# Altium PCB Sensor.PcbDoc
Units mil, origin at the board's own origin, x right, y up, seen from the top; angles counter-clockwise.
Board outline 1750 x 3170 mil, 4 copper layers (Top Layer, Layer 1, Layer 2, Bottom Layer), stack 22.378 mil thick; 58 components, 41 nets, 155 pads, 237 vias.
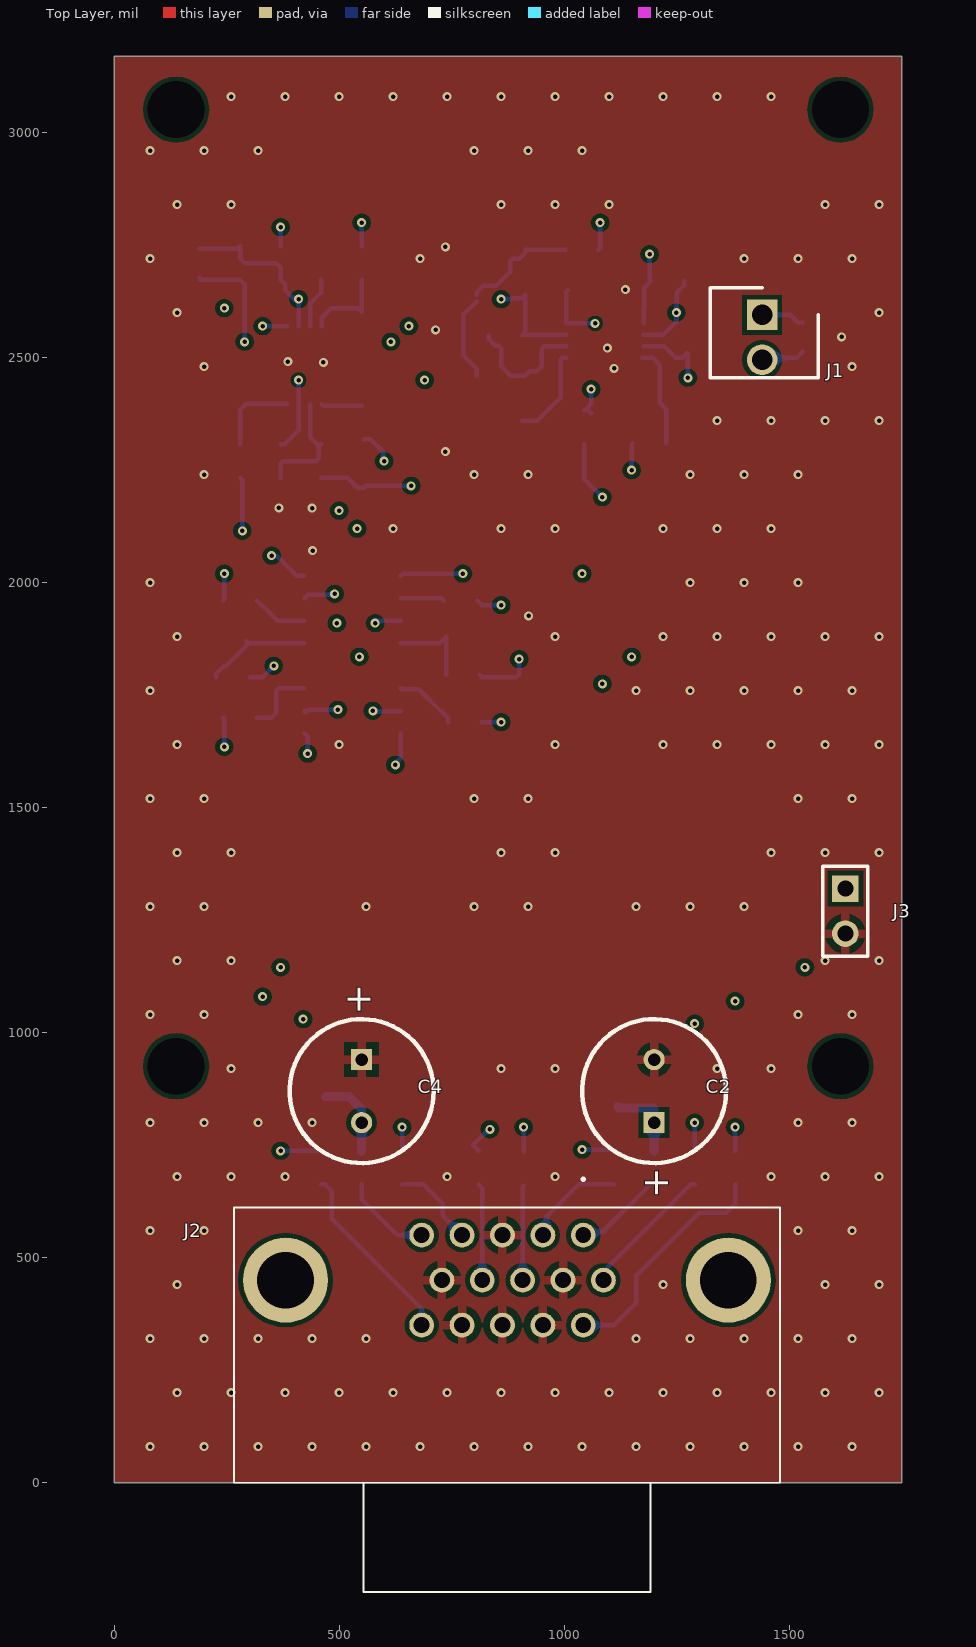
[diagram p0: Top Layer view]
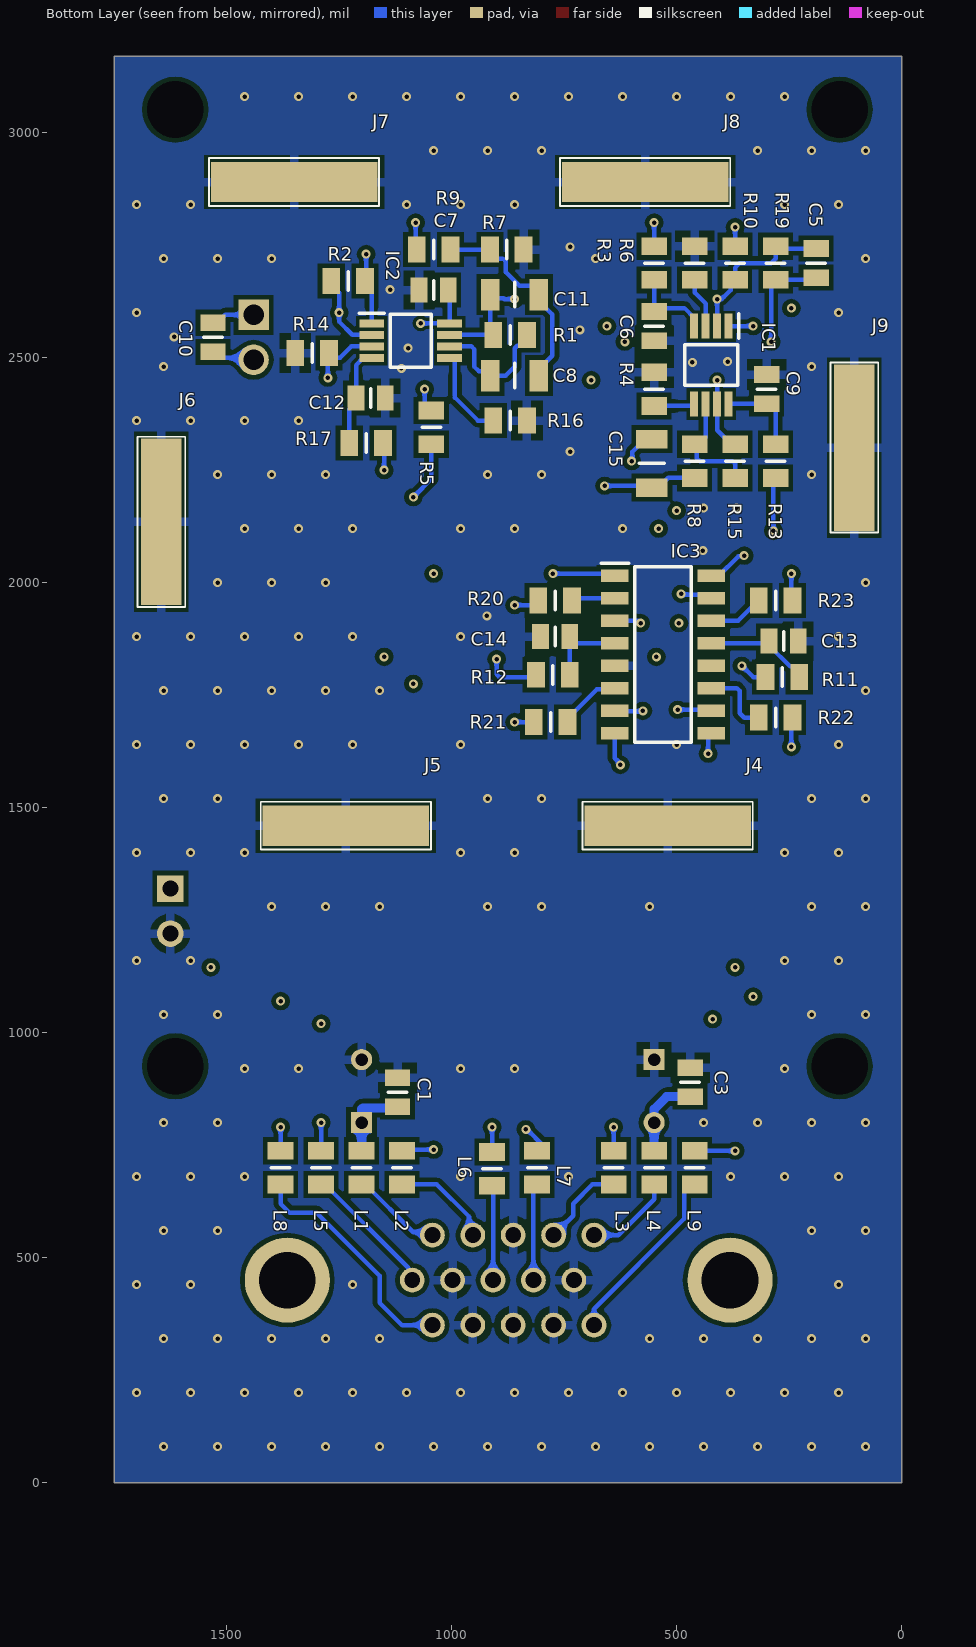
[diagram p1: Bottom Layer view, seen from below]
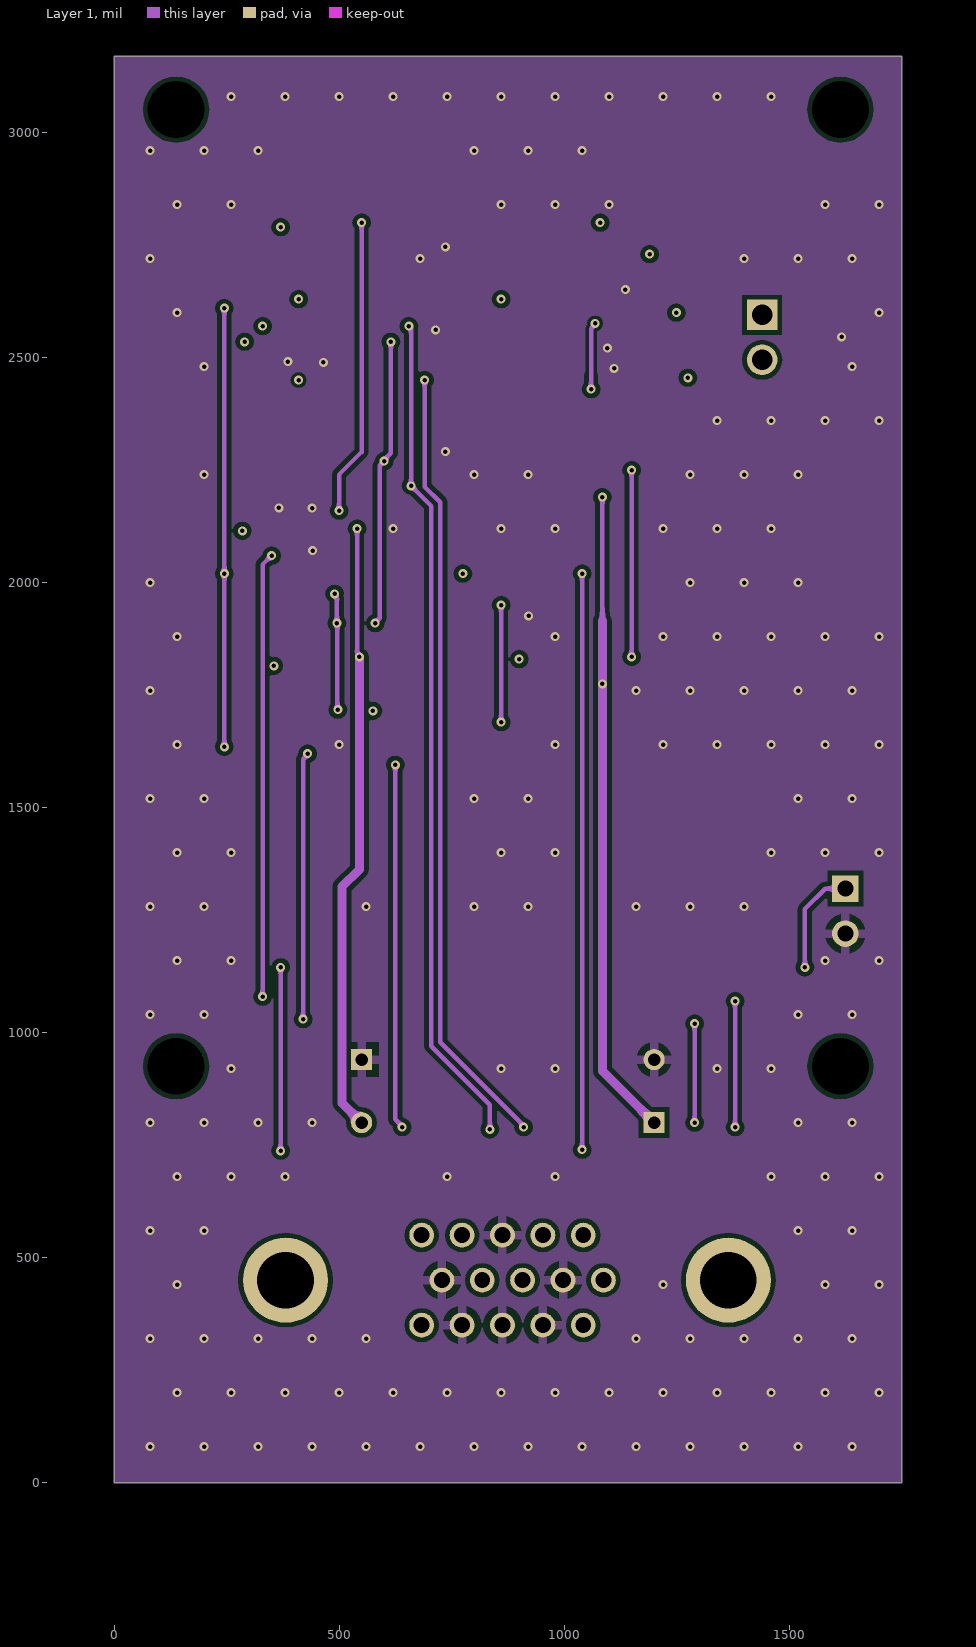
[diagram p2: Layer 1]
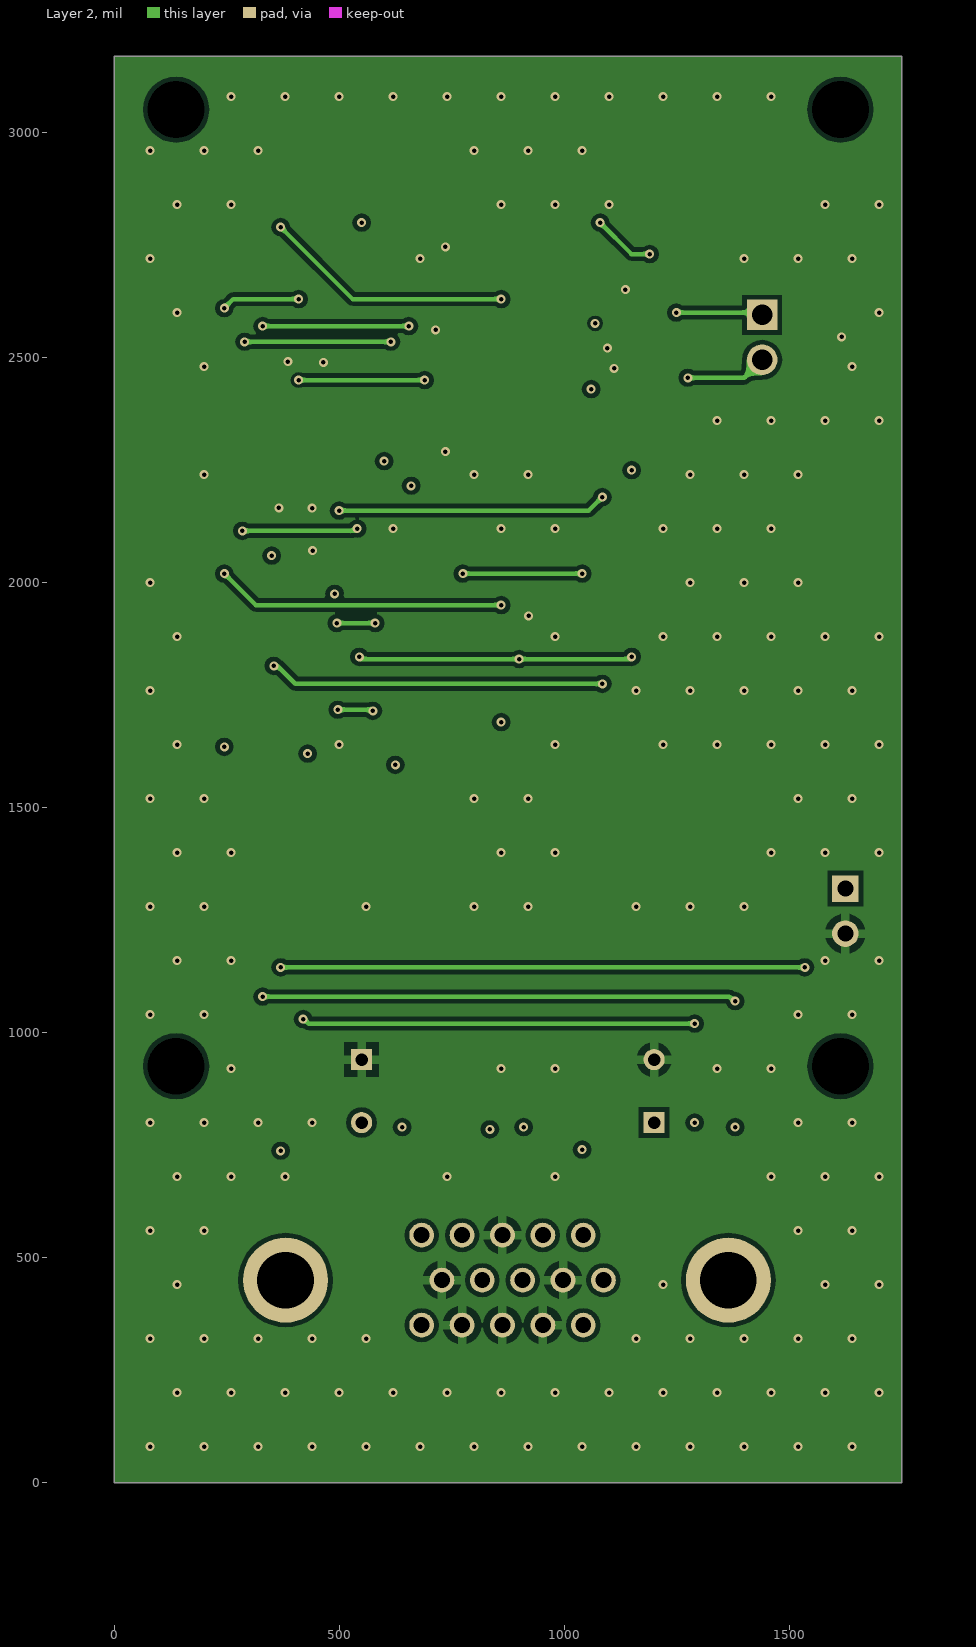
[diagram p3: Layer 2]
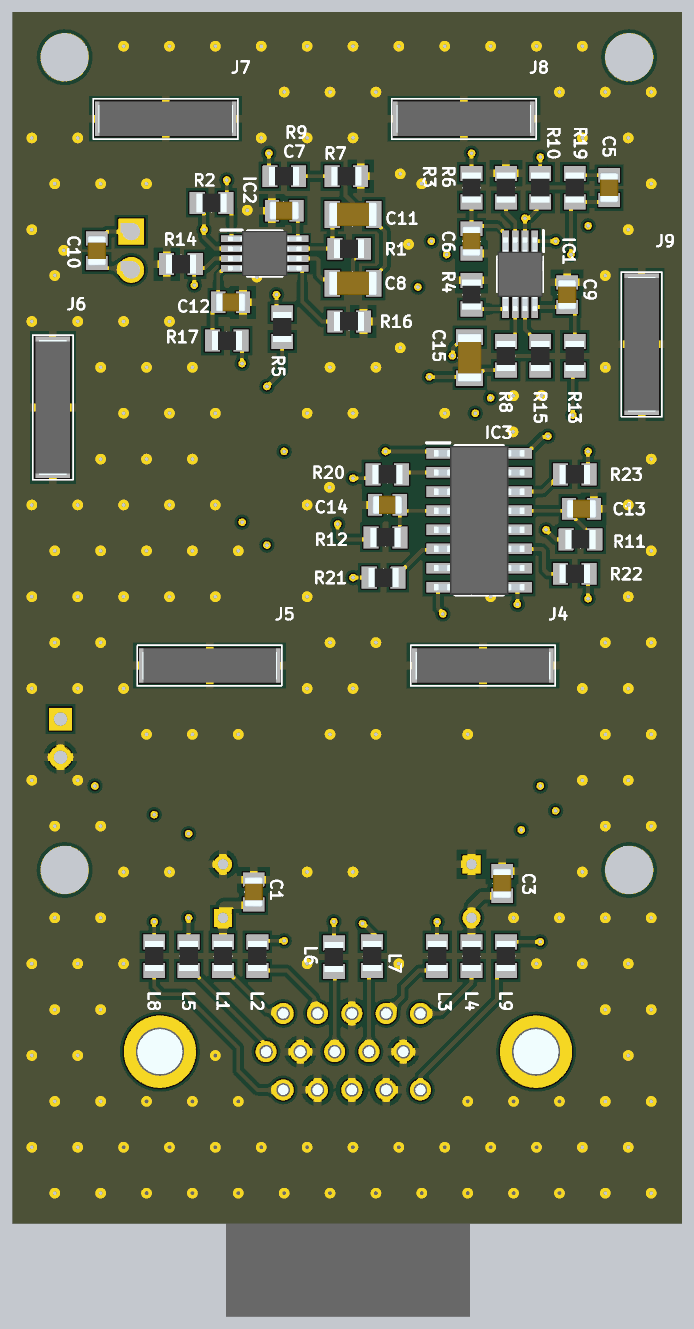
[diagram p4: 3D render of the assembled board from below, using the file's embedded part models]

## Layer stack, top to bottom
Top Solder: solder mask 0.4, Solder Resist, Dk 3.5
Top Layer: signal copper 1.4
Dielectric 2: prepreg 2.8, PP-006, Dk 4.1
Layer 1: signal copper 0.689
Dielectric 1: dielectric 12.6, FR-4, Dk 4.8
Layer 2: signal copper 0.689
Dielectric 3: prepreg 2.8, PP-006, Dk 4.1
Bottom Layer: signal copper 1.4
Bottom Solder: solder mask 0.4, Solder Resist, Dk 3.5

## Board outline
0,0 1750,0 1750,3170 0,3170

## Design rules (kind name [scope] priority, off if disabled: settings)
Clearance Clearance_Room_IC1&2 [WithinRoom('Room_IC1') OR WithinRoom('Room_IC2')] p1: gap=7 ignorepadtopadclearanceinfootprint=FALSE
Clearance [All] p2: gap=10 ignorepadtopadclearanceinfootprint=FALSE except(0: Arc-Hole Track-Hole SMDPad-Hole THPad-Hole Via-Hole Fill-Hole Poly-Hole Region-Hole Text-Hole)
ComponentClearance [All] p1 off: gap=10 collisioncheckmode=3 verticalgap=10 showdistances=FALSE
DiffPairsRouting [All] p1: maxlimit=20 minlimit=10 mostfreqgap=10 toplayer_minwidth=10 toplayer_maxwidth=15 toplayer_prefwidth=10 midlayer1_minwidth=10 midlayer1_maxwidth=15 midlayer1_prefwidth=10 midlayer2_minwidth=10 midlayer2_maxwidth=15 midlayer2_prefwidth=10 bottomlayer_minwidth=10 bottomlayer_maxwidth=15 bottomlayer_prefwidth=10 maxuncoupledlength=500
PlaneConnect PlaneConnect_VIA_GND [InNet('GND')] p1: pad.planeconnectstyle=Relief pad.reliefexpansion=20 pad.reliefentries=4 pad.reliefconductorwidth=10 pad.reliefairgap=10 via.planeconnectstyle=Direct via.reliefexpansion=20 via.reliefentries=4 via.reliefconductorwidth=10 via.reliefairgap=0
PlaneConnect [All] p2: planeconnectstyle=Relief reliefexpansion=20 reliefentries=4 reliefconductorwidth=10 reliefairgap=10
PolygonConnect PolygonConnect_VIA_GND [All] p1: thpad.connectstyle=Relief thpad.reliefconductorwidth=20 thpad.reliefentries=4 thpad.polygonreliefangle="90 Angle" thpad.airgapwidth=15 smdpad.connectstyle=Relief smdpad.reliefconductorwidth=20 smdpad.reliefentries=4 smdpad.polygonreliefangle="90 Angle" smdpad.airgapwidth=15 via.connectstyle=Direct via.reliefconductorwidth=20 via.reliefentries=4 via.polygonreliefangle="90 Angle" via.airgapwidth=15
PolygonConnect [All] p2: connectstyle=Relief reliefconductorwidth=20 reliefentries=4 polygonreliefangle="90 Angle" airgapwidth=15
RoomDefinition Room_IC2 [False] p1: confinementstyle=ConfineIn formatcopy=TRUE lockcomponents=FALSE outline 1220,2620 1220,2460 960,2460 960,2620
RoomDefinition Room_IC1 [False] p2: confinementstyle=ConfineIn formatcopy=TRUE lockcomponents=FALSE outline 503.03,2344.33 343.03,2344.33 343.03,2624.33 503.03,2624.33
RoutingVias [All] p1: holewidth=10 width=20 viastyle="Through Hole" minholewidth=7.87 minwidth=15.75 maxholewidth=28 maxwidth=50
SolderMaskExpansion [All] p1: expansion=4 istentingtop=FALSE
Width [All] p1: maxlimit=100 minlimit=10 preferedwidth=20
27 further rules are at their usual default settings.

## Components (designator, comment, footprint, x,y, rotation, side; value= is the part's Value field where it differs from the comment)
C1 "Capacitor_SMD" CAPC2012X140N 1120,867.72 r90 bottom value=100n
C2 "Capacitor Electrolytic" CAP_EL_8X12R3_5 1200,870 r270 top value=330u
C3 "Capacitor_SMD" CAPC2012X140N 470,890 r90 bottom value=100n
C4 "Capacitor Electrolytic" CAP_EL_8X12R3_5 550,870 r90 top value=330u
C5 "Capacitor_SMD" CAPC2012X140N 190,2710 r90 bottom value=100n
C6 "Capacitor_SMD" CAPC2012X140N 550,2570 r90 bottom value=100n
C7 "Capacitor_SMD" CAPC2012X140N 1040,2650 r180 bottom value=100n
C8 "Capacitor_SMD" CAPC3216X95N 860,2460 r0 bottom value=100n
C9 "Capacitor_SMD" CAPC2012X140N 300,2430 r270 bottom value=100n
C10 "Capacitor_SMD" CAPC2012X140N 1530,2545 r270 bottom value=10p
C11 "Capacitor_SMD" CAPC3216X95N 860,2640 r0 bottom value=100n
C12 "Capacitor_SMD" CAPC2012X140N 1180,2410 r0 bottom value=100n
C13 "Capacitor_SMD" CAPC2012X140N 262.28,1870 r180 bottom value=100n
C14 "Capacitor_SMD" CAPC2012X140N 770,1880 r180 bottom value=100n
C15 "Capacitor_SMD" CAPC3216X95N 555,2265 r90 bottom value=100n
IC1 "AZ4580" SOP65P490X110-8N 422.8,2483.39 r270 bottom
IC2 "AZ4580" SOP65P490X110-8N 1090.94,2537.64 r180 bottom
IC3 "DG442DY-E3" SOIC127P600X175-16N 530,1840 r180 bottom
J1 "640456-2" SHDR2W66P0X254_1X2_508X572X1041P 1440,2595 r90 top
J2 "D-Sub 15 pin" ICD15S13E4GV00LF 1042.56,550 r0 top
J3 "Header 2" HDR1X2 1625,1320 r270 top
J4 "S2711-46R" S271146R 520,1460 r180 bottom
J5 "S2711-46R" S271146R 1235,1460 r180 bottom
J6 "S2711-46R" S271146R 1645,2135 r270 bottom
J7 "S2711-46R" S271146R 1350,2890 r0 bottom
J8 "S2711-46R" S271146R 570,2890 r180 bottom
J9 "S2711-46R" S271146R 105,2300 r90 bottom
L1 "Ferrite Bead" RESC2012X60N 1200,700 r270 bottom
L2 "Ferrite Bead" RESC2012X60N 1110,700 r270 bottom
L3 "Ferrite Bead" RESC2012X60N 640,700 r270 bottom
L4 "Ferrite Bead" RESC2012X60N 550,700 r270 bottom
L5 "Ferrite Bead" RESC2012X60N 1290,700 r270 bottom
L6 "Ferrite Bead" RESC2012X60N 910,697.4 r270 bottom
L7 "Ferrite Bead" RESC2012X60N 810,700 r270 bottom
L8 "Ferrite Bead" RESC2012X60N 1380,700 r270 bottom
L9 "Ferrite Bead" RESC2012X60N 460,700 r270 bottom
R1 "Res_SMD" RESC2012X60N 870,2550 r0 bottom value=1k
R2 "Res_SMD" RESC2012X60N 1230,2670 r180 bottom value=1k
R3 "Res_SMD" RESC2012X60N 550,2710 r270 bottom value=1k
R4 "Res_SMD" RESC2012X60N 550,2430 r270 bottom value=1k
R5 "Res_SMD" RESC2012X60N 1045,2345 r90 bottom value=1k
R6 "Res_SMD" RESC2012X60N 460,2710 r270 bottom value=1k
R7 "Res_SMD" RESC2012X60N 877.4,2740 r0 bottom value=1k
R8 "Res_SMD" RESC2012X60N 460,2270 r270 bottom value=1k
R9 "Res_SMD" RESC2012X60N 1040,2740 r180 bottom value=1k
R10 "Res_SMD" RESC2012X60N 370,2710 r270 bottom value=1k
R11 "Res_SMD" RESC2012X60N 265,1790 r180 bottom value=1k
R12 "Res_SMD" RESC2012X60N 775,1795 r0 bottom value=1k
R13 "Res_SMD" RESC2012X60N 280,2270 r90 bottom value=1k
R14 "Res_SMD" RESC2012X60N 1310,2510 r180 bottom value=1k
R15 "Res_SMD" RESC2012X60N 370,2270 r270 bottom value=1k
R16 "Res_SMD" RESC2012X60N 870,2360 r0 bottom value=1k
R17 "Res_SMD" RESC2012X60N 1190,2310 r0 bottom value=1k
R19 "Res_SMD" RESC2012X60N 280,2710 r270 bottom value=1k
R20 "Res_SMD" RESC2012X60N 770,1960 r180 bottom value=1k
R21 "Res_SMD" RESC2012X60N 780,1690 r180 bottom value=1k
R22 "Res_SMD" RESC2012X60N 280,1700 r0 bottom value=1k
R23 "Res_SMD" RESC2012X60N 280,1960 r0 bottom value=1k

## Footprints (in the part's own frame and the unit in brackets; to place one, negate y for a bottom-side part, rotate by r counter-clockwise, add the part's x,y. Pads: shape width x height; smd on the part's side, far side on the other; paste and mask are expansions set on the pad)
CAP_EL_8X12R3_5 [mm] "Electrolytic capacitor D8 H12 Raster 3.5mm"
  rect 1.2x1.2 hole 0.7: 1(1.778,0)
  round 1.2 hole 0.7: 2(-1.778,0)
  silkscreen extent -4.06,-4.06 4.06,4.06
CAPC2012X140N [mm]
  rect 0.94x1.43 smd: 1(-0.82,0) 2(0.82,0)
  silkscreen extent 0,-0.53 0,0.53, body extent -1,-0.63 1,0.62, height 1.4
CAPC3216X95N [mm]
  rect 1.04x1.78 smd: 1(-1.37,0) 2(1.37,0)
  silkscreen extent 0,-0.7 0,0.7, body extent -1.6,-0.8 1.6,0.8, height 0.95
HDR1X2 [mm] "Connector; Header; 2 Position"
  rect 1.5x1.5 hole 0.9: 1(0,0)
  round 1.5 hole 0.9: 2(2.54,0)
  silkscreen extent -1.27,-1.27 3.81,1.27
ICD15S13E4GV00LF [mm]
  round 1.4 hole 0.9: 1(0,0) 2(-2.28,0) 3(-4.56,0) 4(-6.84,0) 5(-9.12,0) 6(1.14,-2.54) 7(-1.14,-2.54) 8(-3.42,-2.54) 9(-5.7,-2.54) 10(-7.98,-2.54) 11(0,-5.08) 12(-2.28,-5.08) 13(-4.56,-5.08) 14(-6.84,-5.08) 15(-9.12,-5.08)
  round 4.8 hole 3.2: MH1(8.19,-2.54) MH2(-16.8,-2.54)
  silkscreen extent -19.71,-20.14 11.1,3.2, body extent -19.71,-20.14 11.1,1.56, height 13.06
RESC2012X60N [mm]
  rect 1x1.45 smd: 1(-0.95,0) 2(0.95,0)
  silkscreen extent 0,-0.53 0,0.53, body extent -1,-0.62 1,0.62, height 0.6
S271146R [mm]
  rect 9.4x2.28 smd: 1(0,0)
  silkscreen extent -4.8,-1.35 4.8,1.35, body extent -4.47,-1.14 4.47,1.14, height 3.65
SHDR2W66P0X254_1X2_508X572X1041P [mm]
  rect 1.725x1.725 hole 1.15: 1(0,0)
  round 1.725 hole 1.15: 2(-2.54,0)
  silkscreen extent -3.56,-3.18 1.52,2.92, body extent -3.56,-3.05 1.52,2.79, height 9.88
SOIC127P600X175-16N [mm]
  rect 1.55x0.7 smd: 1(-2.725,4.445) 2(-2.725,3.175) 3(-2.725,1.905) 4(-2.725,0.635) 5(-2.725,-0.635) 6(-2.725,-1.905) 7(-2.725,-3.175) 8(-2.725,-4.445) 9(2.725,-4.445) 10(2.725,-3.175) 11(2.725,-1.905) 12(2.725,-0.635) 13(2.725,0.635) 14(2.725,1.905) 15(2.725,3.175) 16(2.725,4.445)
  silkscreen extent -3.5,-4.95 1.6,5.15, body extent -3,-4.95 3,4.95, height 1.75
SOP65P490X110-8N [mm]
  rect 1.4x0.45 smd: 1(-2.2,0.975) 2(-2.2,0.325) 3(-2.2,-0.325) 4(-2.2,-0.975) 5(2.2,-0.975) 6(2.2,-0.325) 7(2.2,0.325) 8(2.2,0.975)
  silkscreen extent -2.9,-1.5 1.15,1.55, body extent -2.45,-1.5 2.45,1.5, height 1.1

## Part data
C1 C3 C5 C6 C7 C8 C9 C10 C11 C12 C13 C14 C15: "Capacitor smd ceramic", Manufacturer_Name=TDK, Manufacturer_Part_Number=C3216C0G1H562J060AA, Datasheet Link=https://product.tdk.com/info/en/catalog/datasheets/mlcc_commercial_midvoltage_en.pdf, Height=0.75mm
C2 C4: "Capacitor polarized electrolytic", Manufacturer_Name=TDK, Manufacturer_Part_Number=B43640A9477M, Mouser Part Number=871-B43640A9477M, Datasheet Link=https://componentsearchengine.com/Datasheets/1/B43640A9477M.pdf, Height=52mm
IC1 IC2: "Operational amplifier", Arrow Part Number=AZ4580
IC3: "Integrated Circuit", Manufacturer_Name=Vishay, Mouser Part Number=781-DG442DY-E3, Arrow Part Number=DG442DY-E3, Arrow Price/Stock=https://www.arrow.com/en/products/dg442dy-e3/vishay, Datasheet Link=http://www.vishay.com/docs/70053/dg441.pdf, Height=1.75mm, Manufacturer_Part_Number=DG442DY-E3, Mouser Price/Stock=https://www.mouser.com/Search/Refine.aspx?Keyword=781-DG442DY-E3
J1: "Connector", Manufacturer_Name="TE Connectivity", Mouser Part Number=571-6404562, Arrow Part Number=640456-2, Arrow Price/Stock=https://www.arrow.com/en/products/640456-2/te-connectivity, Datasheet Link=http://www.te.com/commerce/DocumentDelivery/DDEController?Action=showdoc&DocId=Customer+Drawing%7F640456%7FW3%7Fpdf%7FEnglish%7FENG_CD_640456_W3.pdf%7F640456-2, Height=10.414mm, Manufacturer_Part_Number=640456-2, Mouser Price/Stock=https://www.mouser.co.uk/ProductDetail/TE-Connectivity-AMP/640456-2?qs=%2F35zJ5USjomRu3EJQJgZCQ%3D%3D
J2: "Connector D sub 9 pin pcb angled 90", Arrow Part Number=ICD15S13E4GV00LF, Manufacturer_Name=Amphenol, Mouser Part Number=649-ICD15S13E4GV00LF, Arrow Price/Stock=https://www.arrow.com/en/products/icd15s13e4gv00lf/amphenol-fci, Datasheet Link=https://www.amphenol-icc.com/media/wysiwyg/files/drawing/c-cd-0012.pdf, Height=12.96mm, Manufacturer_Part_Number=ICD15S13E4GV00LF, Mouser Price/Stock=https://www.mouser.co.uk/ProductDetail/Amphenol-FCI/ICD15S13E4GV00LF?qs=XRaITl65jntmDA26LPPFrA%3D%3D, System=Connector
J3: "Header, 2-Pin", LatestRevisionDate=17-Jul-2002, LatestRevisionNote="Re-released for DXP Platform.", Publisher="Altium Limited"
J4 J5 J6 J7 J8 J9: "Connector", Manufacturer_Name=Harwin, Mouser Part Number=855-S2711-46R, Datasheet Link=https://cdn.harwin.com/pdfs/S2711-XXR.pdf, Height=3.55mm, Manufacturer_Part_Number=S2711-46R, Mouser Price/Stock=https://www.mouser.co.uk/ProductDetail/Harwin/S2711-46R?qs=93uzuGORGqcNzTm67lIH2g%3D%3D
L1 L2 L3 L4 L5 L6 L7 L8 L9: "Bead ferrite"
R1 R2 R3 R4 R5 R6 R7 R8 R9 R10 R11 R12 R13 R14 R15 R16 R17 R19 R20 R21 R22 R23: "Resistor SMD", Arrow Part Number=CR1206-FW-1504ELF, Manufacturer_Name=Bourns, Mouser Part Number=652-CR1206FW1504ELF, Arrow Price/Stock=https://www.arrow.com/en/products/cr1206-fw-1504elf/bourns, Datasheet Link=http://componentsearchengine.com/Datasheets/1/CR1206-FW-1504ELF.pdf, Height=0.75mm, Manufacturer_Part_Number=CR1206-FW-1504ELF, Mouser Price/Stock=https://www.mouser.co.uk/ProductDetail/Bourns/CR1206-FW-1504ELF/?qs=6oMev5NRZMFfvXkOpYL2%252BA%3D%3D

## Free pads (board coordinates)
  round 60 hole 125.98: 4(137.8,3051.18) 5(1614.17,3051.18) 6(1614.17,925.2) 7(137.8,925.2)

## Via types
v1: diameter 20, hole 10, Top Layer to Bottom Layer, 237 vias

## Nets (pads, with @x,y where several pads share a name; then routed paths per layer and width w, separated by ;. In a path a pad name is that pad's centre, name@x,y a point inside that pad or via, vN(x,y) a via of type N, cw(c..) or ccw(c..) an arc to the next point about the centre after c; other vN are vias at no path point)
GND: C1.2 C2.2 C3.2 C4.1 C6.1 C7.1 C9.1 C12.1 C13.2 C14.1 IC3.5 J2.3 J2.7 J2.10 J2.12 J2.13 J2.14 J3.2 J4.1 J5.1 J6.1 J7.1 J8.1 J9.1 R4.1 R6.1 R7.1 R14.1 R16.1
  other v1: 80,80 200,80 320,80 440,80 560,80 680,80 800,80 920,80 1040,80 1160,80 1280,80 1400,80 1520,80 1640,80 140,200 260,200 380,200 500,200 620,200 740,200 860,200 980,200 1100,200 1220,200 1340,200 1460,200 1580,200 1700,200 80,320 200,320 320,320 440,320 560,320 1160,320 1280,320 1400,320 1520,320 1640,320 140,440 1220,440 1580,440 1700,440 80,560 200,560 1520,560 1640,560 140,680 260,680 380,680 740,680 980,680 1460,680 1580,680 1700,680 80,800 200,800 320,800 440,800 1520,800 1640,800 260,920 860,920 980,920 1340,920 1460,920 80,1040 200,1040 1520,1040 1640,1040 140,1160 260,1160 1580,1160 1700,1160 80,1280 200,1280 560,1280 800,1280 920,1280 1160,1280 1280,1280 1400,1280 140,1400 260,1400 860,1400 980,1400 1460,1400 1580,1400 1700,1400 80,1520 200,1520 800,1520 920,1520 1520,1520 1640,1520 140,1640 500,1640 980,1640 1220,1640 1340,1640 1460,1640 1580,1640 1700,1640 80,1760 1160,1760 1280,1760 1400,1760 1520,1760 1640,1760 140,1880 980,1880 1220,1880 1340,1880 1460,1880 1580,1880 1700,1880 921.43,1926.07 80,2000 1280,2000 1400,2000 1520,2000 441.43,2071.07 620,2120 860,2120 980,2120 1220,2120 1340,2120 1460,2120 366.43,2166.07 440.13,2165.69 200,2240 800,2240 920,2240 1280,2240 1400,2240 1520,2240 736.43,2291.07 1340,2360 1460,2360 1580,2360 1700,2360 1111.43,2476.07 200,2480 1640,2480 464.92,2489.38 386.43,2491.07 1096.43,2521.07 1616.43,2546.07 714.69,2561.75 140,2600 1700,2600 1136.43,2651.07 80,2720 680,2720 1400,2720 1520,2720 1640,2720 736.43,2746.07 140,2840 260,2840 860,2840 980,2840 1100,2840 1580,2840 1700,2840 80,2960 200,2960 320,2960 800,2960 920,2960 1040,2960 260,3080 380,3080 500,3080 620,3080 740,3080 860,3080 980,3080 1100,3080 1220,3080 1340,3080 1460,3080
NetC5_1: C5.1 C15.2 IC3.3 IC3.7 IC3.10 IC3.15 R19.2 | length 1957.2
  Layer 1 w10: v1@495,1967.29 v1(495,1910) 496.25,1908.75 496.25,1718.75 v1(497.5,1717.5) ; v1(580,1910) 580,1910.86 590,1920.86 590,2259.14 600,2269.14 600,2272.71 615,2287.71 v1(615,2535)
  Layer 2 w10: v1(290,2535) v1(615,2535) ; v1@487.29,1975 v1(490,1975) ; v1(495,1910) v1(580,1910) ; v1(497.5,1717.5) 572.5,1717.5 v1(575,1715)
  Bottom Layer w10: C5.1 190,2672.6 R19.2 290,2662.6 v1(290,2535) ; IC3.10 425.8,1711.91 431.39,1717.5 v1(497.5,1717.5) ; IC3.15 430.8,1973.09 488.09,1973.09 v1(490,1975) ; C15.2 569.57,2318.94 598.09,2290.42 598.09,2271.91 v1(600,2270) ; v1(575,1715) 576.25,1713.75 636.03,1713.75 IC3.7 ; v1@587.71,1915 IC3.3
NetC5_2: C5.2 IC1.2 R10.2 R19.1 R20.1 R21.1 R22.1 R23.1 | length 2708.8
  Layer 1 w10: v1(245,1635) v1(245,2610) ; v1(860,1690) v1(860,1950)
  Layer 2 w10: v1(245,2020) 315,1950 v1(860,1950) ; v1(245,2610) 265,2630 v1(410,2630)
  Bottom Layer w10: C5.2 274.88,2742.28 R19.1 280,2720 290,2710 360,2710 370,2700 R10.2 380,2662.6 380,2650 400,2630 v1(410,2630) ; R22.1 245,1697.6 v1(245,1635) ; R23.1 245,1962.4 v1(245,2020) ; R20.1 817.4,1950 v1(860,1950) ; R21.1 v1(860,1690) ; v1(410,2630) IC1.2 v1(410,2630)
NetC6_2: C6.2 IC1.4 R3.2 | length 189.9
  Bottom Layer w10: IC1.4 461.18,2588.7 482.48,2610 542.28,2610 C6.2 R3.2
NetC7_2: C7.2 IC2.8 R5.2 | length 361
  Layer 1 w10: v1(1060,2430) 1060,2460 1060,2564.34 1068.98,2573.32 v1(1068.98,2576.02)
  Bottom Layer w10: C7.2 1004.33,2646.61 IC2.8 v1(1068.98,2576.02) ; R5.2 R5.2@1045.31,2382.4 ; R5.2@1060,2376.26 1053.86,2382.4 R5.2@1045.31,2382.4 ; v1(1060,2430) 1060,2397.09 R5.2@1045.31,2382.4
NetC8_1: C8.1 C11.1 R7.2 R9.2 | length 447.8
  Bottom Layer w10: C8.1 806.06,2474.57 776.45,2504.18 776.45,2595.82 C11.1@806.06,2625.43 ; C11.1 806.06,2644.53 821.54,2660 850,2660 880,2690 880,2714.14 885.86,2720 900.12,2720 914.8,2734.69 R7.2 R9.2
NetC8_2: C8.2 IC2.6 R1.1 | length 287.7
  Bottom Layer w10: R1.1 832.6,2541.14 847.28,2526.46 854.14,2526.46 860,2520.6 860,2480 880,2460 C8.2 923.94,2470 940,2470 950,2480 950,2518.98 955.86,2524.84 IC2.6
NetC9_2: C9.2 IC1.8 R13.2 | length 187.2
  Bottom Layer w10: R13.2 280,2384.21 293.5,2397.72 C9.2 383.46,2397.72 IC1.8
NetC10_1: C10.1 IC2.2 J1.1 R2.1 | length 476.5
  Layer 2 w10: v1(1249.62,2600) 1435,2600 J1.1
  Bottom Layer w10: IC2.2 1220,2550.43 1220.43,2550.43 1250,2580 1250,2592.29 1246.91,2595.38 1246.91,2597.29 v1(1249.62,2600) 1246.91,2602.71 1246.91,2604.62 1250,2607.71 1250,2643.74 1267.4,2661.14 R2.1 ; J1.1 1502.64,2595 1520.35,2577.28 C10.1
NetC10_2: C10.2 IC2.3 J1.2 R14.2 | length 443.4
  Layer 2 w10: v1(1275,2455) 1400,2455 J1.2
  Bottom Layer w10: IC2.3 1222.5,2524.84 1247.34,2500 1262.6,2500 R14.2 ; v1(1275,2455) R14.2@1275,2510 ; J1.2 1444.21,2499.21 1516.5,2499.21 C10.2
NetC11_2: C11.2 IC2.7 R1.2 R10.1 | length 846.2
  Layer 2 w10: v1(370,2790) 530,2630 v1(860,2630)
  Bottom Layer w10: R10.1 v1(370,2790) ; v1(860,2630) 882.74,2630 884.32,2631.58 905.52,2631.58 C11.2 913.94,2556.54 R1.2@907.83,2550.43 ; R1.2 R1.2@907.83,2550.43 ; IC2.7 R1.2@907.83,2550.43
NetC12_2: C12.2 IC2.4 R17.2 | length 224.6
  Bottom Layer w10: IC2.4@1173.86,2499.25 IC2.4 1196.26,2499.25 1212.28,2483.23 1212.28,2460 C12.2 1212.28,2400.35 1227.4,2385.24 R17.2
NetC13_1: C13.1 IC3.13 R11.2 | length 239.1
  Bottom Layer w10: R11.2 227.6,1798.86 242.28,1813.54 247.76,1813.54 294.57,1860.35 C13.1 ; C13.1@294.57,1865 IC3.13
NetC14_2: C14.2 IC3.4 R12.1 | length 191.1
  Bottom Layer w10: IC3.4 724.21,1865 C14.2@737.72,1878.5 ; R12.1 737.72,1795.12 C14.2@737.72,1878.5 ; C14.2 C14.2@737.72,1878.5
NetIC1_3: IC1.3 R6.2 | length 112.7
  Bottom Layer w10: IC1.3 435.59,2620 460,2644.41 R6.2
NetIC1_5: IC1.5 R4.2 | length 90.7
  Bottom Layer w10: IC1.5 461.18,2396.46 465.04,2392.6 503.03,2392.6 R4.2
NetIC1_6: IC1.6 R8.1 R15.2 | length 257.3
  Bottom Layer w10: R15.2 370,2264.14 375.86,2270 448.83,2270 454.69,2275.86 R8.1@454.69,2307.4 ; IC1.6 435.59,2322.95 451.14,2307.4 R8.1@454.69,2307.4 ; R8.1 R8.1@454.69,2307.4
NetIC2_1: IC2.1 R2.2 R9.1 | length 361.6
  Layer 2 w10: v1(1080,2800) 1080,2799.64 1149.64,2730 v1(1190,2730)
  Bottom Layer w10: R9.1 1080,2742.6 v1(1080,2800) ; IC2.1 1177.56,2612.99 1177.91,2613.35 1177.91,2655.31 R2.2 1190,2672.6 v1(1190,2730)
NetIC2_5: IC2.5 R16.2 | length 200.1
  Bottom Layer w10: R16.2 941.46,2360 992.6,2411.14 ; 992.6,2414.99 992.6,2460 992.6,2495.39 996.46,2499.25 IC2.5
NetIC3_1: IC3.1 L2.1 | length 1755.9
  Layer 1 w10: v1(1040,740) v1(1040,2020)
  Layer 2 w10: v1(775,2020) v1(1040,2020)
  Bottom Layer w10: IC3.1 642.28,2020 v1(775,2020) ; v1(1040,740) 1107.4,740 L2.1
NetIC3_2: IC3.2 R20.2 | length 97.4
  Bottom Layer w10: IC3.2 727.6,1965 R20.2
NetIC3_6: IC3.6 R21.2 | length 141.6
  Bottom Layer w10: IC3.6 639.22,1763.06 676.94,1763.06 726.46,1713.54 727.91,1713.54 742.6,1698.86 R21.2
NetIC3_8: IC3.8 L3.1 | length 938.9
  Layer 1 w10: v1(625,1595) 625,807.71 640,792.71 v1(640,790)
  Bottom Layer w10: v1(625,1595) 625,1597.71 637.28,1609.99 IC3.8 ; L3.1 v1(640,790)
NetIC3_9: IC3.9 L5.1 | length 1798.9
  Layer 1 w10: v1(420,1030) 420,1607.29 430,1617.29 v1(430,1620) ; v1(1290,800) v1(1290,1020)
  Layer 2 w10: v1(420,1030) 422.71,1030 432.71,1020 v1(1290,1020)
  Bottom Layer w10: IC3.9 430,1657.72 v1(430,1620) ; L5.1 v1(1290,800)
NetIC3_11: IC3.11 R22.2 | length 161
  Bottom Layer w10: R22.2 350,1700 360,1710 360,1759.14 365.86,1765 IC3.11
NetIC3_14: IC3.14 R23.2 | length 124
  Bottom Layer w10: R23.2 326.26,1951.14 327.4,1951.14 363.54,1915 IC3.14
NetIC3_16: IC3.16 L8.1 | length 2466.4
  Layer 1 w10: v1(330,1080) 330,2035 330,2040 v1(350,2060) ; v1(1380,790) v1(1380,1070)
  Layer 2 w10: v1(330,1080) 1367.29,1080 1377.29,1070 v1(1380,1070)
  Bottom Layer w10: v1(350,2060) 351.91,2058.09 362.9,2058.09 405.98,2015 IC3.16 ; L8.1 v1(1380,790)
NetJ2_1: J2.1 L1.2 | length 204.1
  Bottom Layer w10: J2.1 1049.13,556.57 1085.12,556.57 1191.14,662.6 L1.2
NetJ2_2: J2.2 L2.2 | length 223.1
  Bottom Layer w10: J2.2 961.43,558.63 961.43,591.43 1032.6,662.6 L2.2
NetJ2_4: J2.4 L3.2 | length 195.6
  Bottom Layer w10: L3.2 687.4,662.6 730,620 730,593.27 J2.4
NetJ2_5: J2.5 L4.2 | length 199.2
  Bottom Layer w10: L4.2 550,630 630,550 J2.5
NetJ2_6: J2.6 L5.2 | length 301.7
  Bottom Layer w10: J2.6 1096.07,458.63 1096.07,477.53 1281.14,662.6 L5.2
NetJ2_8: J2.8 L6.2 | length 210.9
  Bottom Layer w10: J2.8 907.91,657.91 L6.2
NetJ2_9: J2.9 L7.2 | length 216
  Bottom Layer w10: L7.2 818.15,654.45 J2.9
NetJ2_11: J2.11 L8.2 | length 527
  Bottom Layer w10: J2.11 1110,350 1160,400 1160,460 1300,600 1360,600 1380,620 L8.2
NetJ2_15: J2.15 L9.2 | length 410.4
  Bottom Layer w10: L9.2 468.86,662.6 483.54,647.91 483.54,586.46 683.3,386.7 683.3,350.21 J2.15
NetJ3_1: J3.1 L9.1 | length 1901
  Layer 1 w10: v1(370,737.4) v1(370,1145) ; v1(1535,1145) 1535,1274.53 1580.47,1320 J3.1
  Layer 2 w10: v1(370,1145) v1(1535,1145)
  Bottom Layer w10: v1(370,737.4) L9.1
VCC: C1.1 C2.1 L1.1 R3.1 R5.1 R11.1 | length 3864.2
  Layer 1 w10: v1(500,2160) 500,2240 550,2290 v1(550,2800) ; 1085,1915 v1(1085,2190)
  Layer 1 w20: 1085,1915 v1(1085,1775) 1085,915 C2.1
  Layer 2 w10: v1(355,1815) 362.4,1815 402.4,1775 v1(1085,1775) ; v1(500,2160) 1055,2160 v1(1085,2190)
  Bottom Layer w10: R11.1 330,1790 v1(355,1815) ; R3.1 v1(550,2800) ; R5.1 1045,2230 v1@1083.09,2191.91
  Bottom Layer w20: C1.1 1122.72,832.72 1197.28,832.72 1200,830 C2.1 L1.1
VEE: C3.1 C4.2 L4.1 R12.2 R13.1 R17.1 | length 3128.4
  Layer 1 w10: v1(540,2120) 540,1842.71 545,1837.71 v1(545,1835) ; v1(1150,1835) v1(1150,2250)
  Layer 1 w20: v1(545,1835) 545,1362.31 506.38,1323.69 506.38,843.62 C4.2
  Layer 2 w10: v1(285,2115) 532.29,2115 537.29,2120 v1(540,2120) ; v1(545,1835) 547.71,1835 552.71,1830 1142.29,1830 1147.29,1835 v1(1150,1835)
  Bottom Layer w10: R13.1 285,2227.6 v1(285,2115) ; R12.2 817.4,1790 894.14,1790 900,1795.86 v1(900,1830) ; v1(1150,2250) 1150,2307.4 R17.1
  Bottom Layer w20: C3.1 522.28,857.72 550,830 C4.2 L4.1
VOUT_N: C15.1 IC1.1 L7.1 R8.2 | length 2519.4
  Layer 1 w10: v1(655,2570) 655,2567.29 660,2562.29 v1(660,2215) 705,2170 705,970 835,840 v1(835,785)
  Layer 2 w10: v1(330,2570) v1(655,2570)
  Bottom Layer w10: v1(330,2570) IC1.1 ; R8.2 518.9,2232.6 540.43,2211.06 C15.1 558.94,2215 v1(660,2215) ; L7.1 797.4,750 832.4,785 v1(835,785)
VOUT_P: IC1.7 L6.1 R15.1 | length 2250.7
  Layer 1 w10: v1(690,2450) 690,2213.28 725,2178.28 725,978.28 910,793.28 v1(910,790)
  Layer 2 w10: v1(410,2450) v1(690,2450)
  Bottom Layer w10: R15.1 378.86,2307.4 410,2338.54 IC1.7 v1(410,2450) ; L6.1 v1(910,790)
pads on no net: IC3.12 J2.MH1 J2.MH2

## Polygon pours and split planes (outlines as drawn)
GND on Top Layer "GND_TOP" (solid, pour order 0): 0,0 1750,0 1750,3170 0,3170
GND on Bottom Layer "GND_BOT" (solid, pour order 1): 0,0 1750,0 1750,3170 0,3170
GND on Layer 1 "GND_L1" (solid, pour order 2): 0,0 1750,0 1750,3170 0,3170
GND on Layer 2 "GND_L2" (solid, pour order 3): 0,0 1750,0 1750,3170 0,3170

## Text inside footprints (layer, text, board x,y; h text height)
C2: Top Overlay "+" at 1180,700 h59.06 r270
C4: Top Overlay "+" at 570,1040 h59.06 r90